# Altium PCB merlab_pcb_v0.PcbDoc
Units mm, origin at the board's own origin, x right, y up, seen from the top; angles counter-clockwise.
Board outline 120 x 74.03 mm, 2 copper layers (Top Layer, Bottom Layer); 59 components, 57 nets, 201 pads, 70 vias.
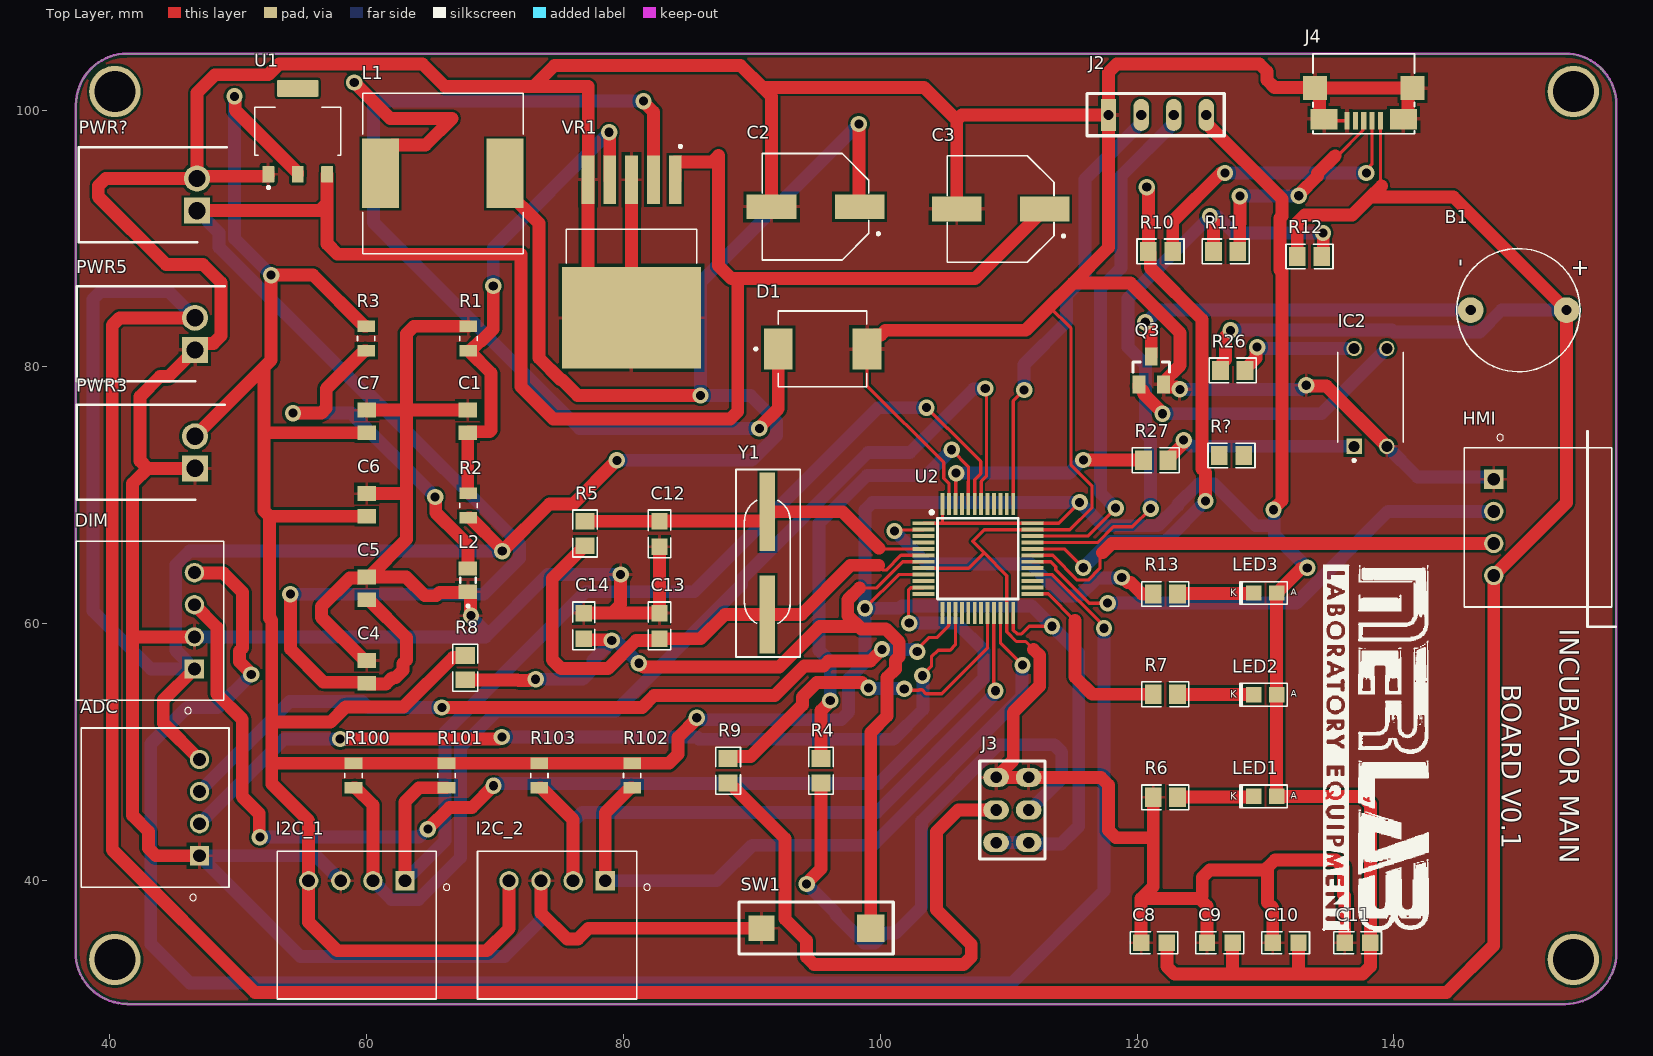
[diagram p0: Top Layer view]
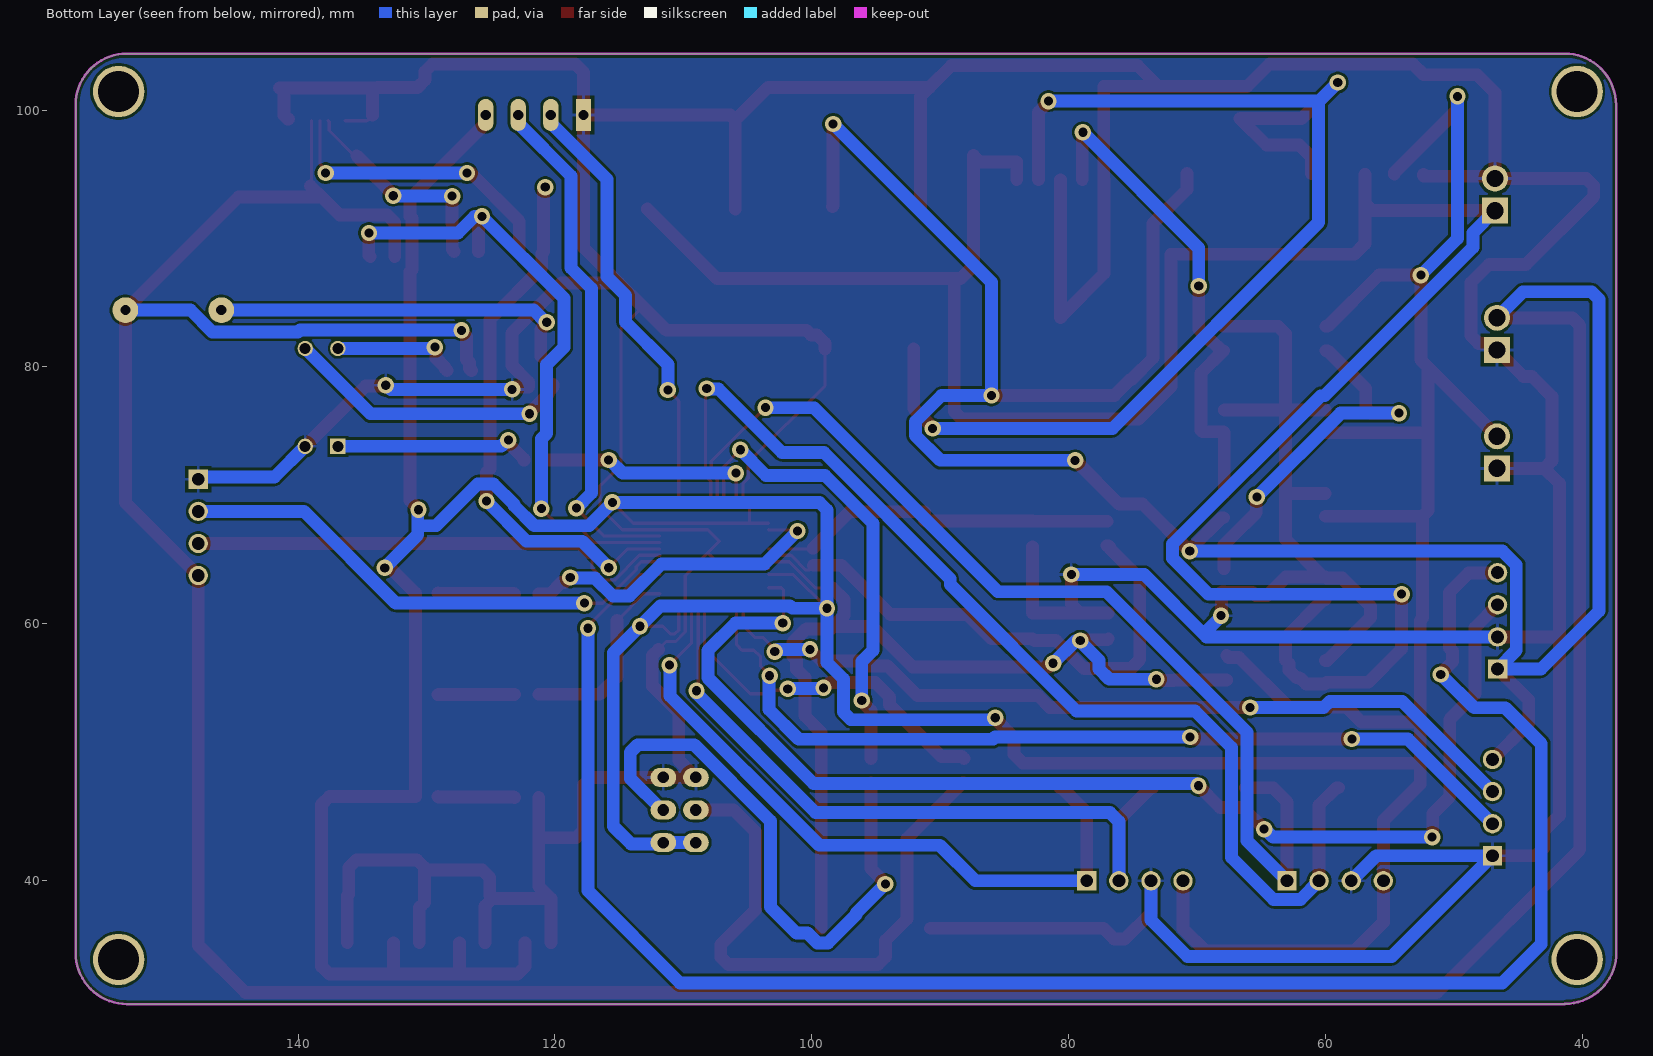
[diagram p1: Bottom Layer view, seen from below]
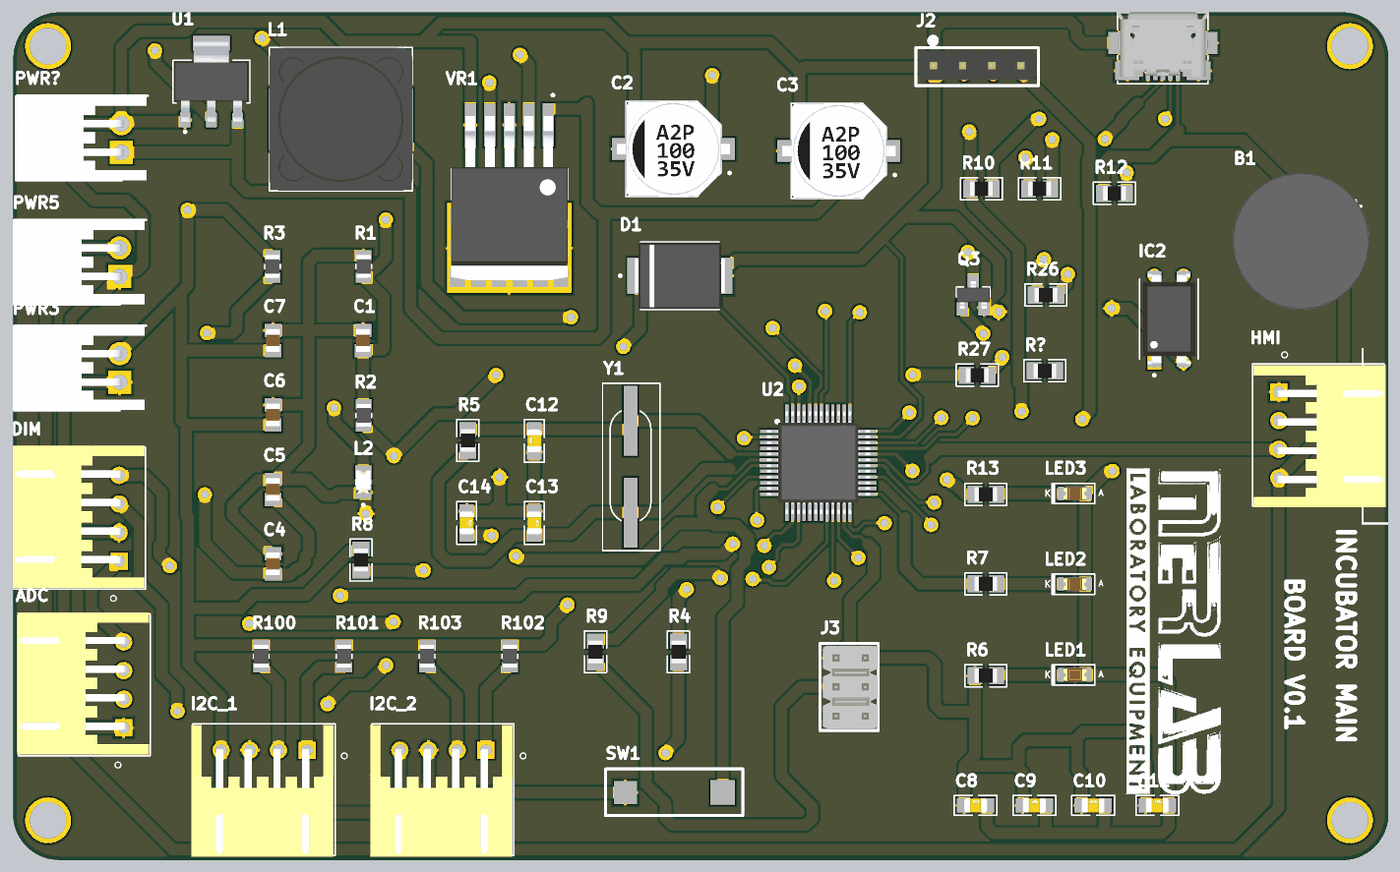
[diagram p2: 3D render of the assembled board from above, using the file's embedded part models]

## Layer stack, top to bottom
Top Solder: solder mask 0.0102, Solder Resist, Dk 3.5
Top Layer: signal copper 0.0356
Dielectric 1: dielectric 0.32, FR-4, Dk 4.8
Bottom Layer: signal copper 0.0356
Bottom Solder: solder mask 0.0102, Solder Resist, Dk 3.5

## Board outline
37.325,34.4 ccw(c41.325,34.4) 41.325,30.4 41.35,30.375 153.325,30.375 ccw(c153.325,34.375) 157.325,34.375 157.325,100.4 ccw(c153.325,100.4) 153.325,104.4 41.35,104.4 ccw(c41.35,100.4) 37.35,100.4 37.325,100.375

## Design rules (kind name [scope] priority, off if disabled: settings)
Clearance [All] p1: gap=0.2 ignorepadtopadclearanceinfootprint=FALSE
PolygonConnect [All] p1: connectstyle=Relief reliefconductorwidth=0.254 reliefentries=4 polygonreliefangle="90 Angle" airgapwidth=0.254
RoutingVias [All] p1: holewidth=0.711 width=1.27 viastyle="Through Hole" minholewidth=0.711 minwidth=1.27 maxholewidth=0.711 maxwidth=1.27
SolderMaskExpansion [All] p1: expansion=0.102 istentingtop=FALSE
Width [All] p1: maxlimit=3 minlimit=0.254 preferedwidth=1 minimp=50.000000 maximp=50.000000 favimp=50.000000
30 further rules are at their usual default settings.

## Classes and differential pairs
component class power_module: C1 C2 C3 C4 C5 C6 C7 D1 L1 L2 PWR? R1 R2 R3 U1 VR1
component class MCU_STM32: C8 C9 C10 C11 C12 C13 C14 J2 J3 LED1 LED2 LED3 R4 R5 R6 R7 R8 R9 R13 SW1 U2 Y1
component class MCU_Con: ADC B1 DIM HMI I2C_1 I2C_2 IC2 J4 PWR3 PWR5 Q3 R10 R11 R12 R26 R27 R100 R101 R102 R103 R?

## Components (designator, comment, footprint, x,y, rotation, side; value= is the part's Value field where it differs from the comment)
ADC "S3B-XH-A(LF)(SN)_1" JST_S4B-XH-A(LF)(SN) 46.975,45.675 r90 top
B1 "Buzzer" BUZZ 149.7,84.425 r270 top
C1 "1.2nF" CAP0805 67.867,75.752 r270 top
C2 "330uF" CAP220uF 94.95,92.475 r180 top
C3 "27uF" CAP220uF 109.375,92.3 r180 top
C4 "10uF" CAP0805 60,56.244 r90 top
C5 "0.1uF" CAP0805 60,62.747 r90 top
C6 "10uF" CAP0805 60,69.249 r90 top
C7 "0.1uF" CAP0805 60,75.752 r90 top
C8 "0.1uF" CAP_0805 121.313,35.153 r0 top
C9 "0.1uF" CAP_0805 126.438,35.153 r0 top
C10 "0.1uF" CAP_0805 131.564,35.153 r0 top
C11 "0.1uF" CAP_0805 137.164,35.153 r0 top
C12 "22pF" CAP_0805 82.8,66.99 r90 top
C13 "22pF" CAP_0805 82.8,59.825 r270 top
C14 "0.1uF" CAP_0805 76.898,59.825 r270 top
D1 "SS34" SS34DIODE 95.5,81.4 r0 top
DIM "S3B-XH-A(LF)(SN)_1" JST_S4B-XH-A(LF)(SN) 46.575,60.225 r90 top
HMI "S3B-XH-A(LF)(SN)_1" JST_S4B-XH-A(LF)(SN) 147.775,67.5 r270 top
I2C_1 "S3B-XH-A(LF)(SN)_1" JST_S4B-XH-A(LF)(SN) 59.225,39.975 r180 top
I2C_2 "S3B-XH-A(LF)(SN)_1" JST_S4B-XH-A(LF)(SN) 74.825,39.975 r180 top
IC2 "LTV-817" OPTO 138.175,77.625 r90 top
J2 "4X1 Bergstrip" CON4_100_40D72_TH_ST_MALE 117.77,99.625 r90 top
J3 "2X3 Berg Strip" CON6_100_59D78_TH_ST_Duplicate 111.55,42.95 r90 top
J4 "MICRO USB2.0" CON_10118192-0001LF_SMD 137.65,100.45 r180 top
L1 "33uH" INDUCTOR 65.925,95.075 r180 top
L2 "LED" LED 67.877,63.385 r90 top
LED1 "RED LED" LED_0805 129.978,46.551 r0 top
LED2 "RED LED" LED_0805 129.978,54.471 r0 top
LED3 "RED LED" LED_0805 129.978,62.391 r0 top
PWR3 "S2B-XH-A_LF__SN_" SHDRRA2W80P0X250_1X2_740X1150X610P 46.62,72.097 r90 top
PWR5 "S2B-XH-A_LF__SN_" SHDRRA2W80P0X250_1X2_740X1150X610P 46.62,81.323 r90 top
PWR? "S2B-XH-A_LF__SN_" SHDRRA2W80P0X250_1X2_740X1150X610P 46.775,92.175 r90 top
Q3 "MMBT2222*" SOT23-BEC 121.1,79.725 r0 top
R1 "1K" RES0805 67.912,82.21 r90 top
R2 "3.09K" RES0805 67.912,69.204 r90 top
R3 "1K" RES0805 59.955,82.21 r90 top
R4 "10K" RES_0805 95.375,48.551 r90 top
R5 "10Mohm" RES_0805 77,67.025 r90 top
R6 "1K" RES_0805 122.2,46.475 r180 top
R7 "1K" RES_0805 122.2,54.5 r180 top
R8 "10K" RES_0805 67.675,56.575 r270 top
R9 "10K" RES_0805 88.142,48.551 r90 top
R10 "20R" RES_0805 121.823,88.995 r180 top
R11 "20R" RES_0805 126.898,88.995 r180 top
R12 "4.7K" RES_0805 133.425,88.6 r180 top
R13 "1K" RES_0805 122.2,62.314 r180 top
R26 "1K" RES_0805 127.45,79.725 r0 top
R27 "1K" RES_0805 121.45,72.725 r0 top
R100 "4.7K" RES0805 58.975,48.175 r270 top
R101 "4.7K" RES0805 66.208,48.175 r270 top
R102 "4.7K" RES0805 80.673,48.175 r270 top
R103 "4.7K" RES0805 73.44,48.175 r270 top
R? "4.7K" RES_0805 127.35,73.1 r0 top
SW1 "TACT SWITCH" SW_342_SMD 90.75,36.275 r180 top
U1 "AMS1117-3.3" SOT229P700X180-4N 54.625,98.35 r0 top
U2 "STM32F103C8T6" LQFP-48_19.6_393_58X11_SMD 107.6,65.075 r0 top
VR1 "LM2596S-5.0" LM2596S 80.625,88.175 r270 top
Y1 "8MHz" XTAL_314_240X47_SMD 91.2,68.725 r270 top

## Footprints (in the part's own frame and the unit in brackets; to place one, negate y for a bottom-side part, rotate by r counter-clockwise, add the part's x,y. Pads: shape width x height; smd on the part's side, far side on the other; paste and mask are expansions set on the pad)
BUZZ [mm]
  round 2 hole 0.8: N(0,-3.725) P(0,3.75)
  silkscreen extent -4.8,-4.8 4.8,4.8, body extent -6,-6 6,6, height 9
CAP220uF [mm]
  rect 3.86x1.92 smd: 1(-3.429,0) 2(3.429,0)
  silkscreen extent -5,-4.15 4.15,4.15, body extent -4.95,-4.15 4.95,4.15, height 10.2
CAP0805 [mm]
  rect 1.16x1.47 smd: 1(-0.88,0) 2(0.88,0)
  body extent -1,-0.63 1,0.63, height 0.94
CAP_0805 [mm] "Ceramic Capacitor"
  rect 1.27x1.27 smd mask+0.076: 1(-1,0) 2(1,0)
  silkscreen extent -1.86,-0.86 1.86,0.86, body extent -1,-0.62 1,0.63, height 0.78
CON4_100_40D72_TH_ST_MALE [mm] "Berg Strip"
  rect 2.5x1.2 hole 0.8: 1(0,0)
  oval 2.5x1.2 hole 0.8: 2(0,-2.54) 3(0,-5.08) 4(0,-7.62)
  round 1.016 on Top Overlay: ""(2.311,0.178)
  silkscreen extent -1.63,-9.02 1.68,1.68, body extent -1.14,-8.76 1.4,1.4, height 8.55
CON6_100_59D78_TH_ST_Duplicate [mm] "Berg strip"
  oval 1.5x2 hole 0.9: 1(0,0) 2(0,2.54) 3(2.54,0) 4(2.54,2.54) 5(5.08,0) 6(5.08,2.54)
  silkscreen extent -1.27,-1.27 6.35,3.81, body extent -1.07,-1.27 6.15,3.56, height 8.18
CON_10118192-0001LF_SMD [mm] "USB2.0 MICRO"
  rect 0.4x1.35 smd: 1(-1.3,1.275) 2(-0.65,1.275) 3(0,1.275) 4(0.65,1.275) 5(1.3,1.275)
  rect 2.1x1.6 smd: 6(-3.1,1.15) 7(3.1,1.15)
  rect 1.9x1.9 smd: 8(-3.8,-1.275) 9(3.8,-1.275)
  silkscreen extent -3.95,-3.94 3.95,2.3, body extent -4.04,-3.94 4.04,1.66, height 2.81
INDUCTOR [mm]
  rect 2.9x5.4 smd: 1(-4.85,0) 2(4.85,0)
  silkscreen extent -6.25,-6.25 6.25,6.25, body extent -6.25,-6.25 6.25,6.25, height 6
JST_S4B-XH-A(LF)(SN) [mm]
  rect 1.508x1.508 hole 1: 1(-3.75,0)
  round 1.508 hole 1: 2(-1.25,0) 3(1.25,0) 4(3.75,0)
  silkscreen extent -7.25,-2.3 6.2,9.2, body extent -6.07,-2.19 6.33,9.31, height 6.15
LED [mm]
  rect 1.1x1.45 smd: A(0.9,0) C(-0.9,0)
  silkscreen extent -2.1,-0.6 0.2,0.6, body extent -1,-0.63 1,0.63, height 0.8
LED_0805 [mm] "LED"
  rect 1.2x1.2 smd mask+0.076: A(0.889,0) K(-0.889,0)
  silkscreen extent -1.99,-0.89 1.73,0.89, body extent -1.01,-0.62 1.01,0.63, height 1.1
LM2596S [mm]
  rect 3.79x0.99 smd: 1(-6.4,3.4) 2(-6.4,1.7) 3(-6.4,0) 4(-6.4,-1.7) 5(-6.4,-3.4)
  rect 7.88x10.84 smd paste-6: 6(4.35,0)
  silkscreen extent -9.1,-5.08 0.09,5.08, body extent -7.18,-5.08 7.18,5.08, height 4.65
LQFP-48_19.6_393_58X11_SMD [mm] "48LQFP"
  rect 1.7x0.3 smd mask+0.076: 1(-4.238,2.75) 2(-4.238,2.25) 3(-4.238,1.75) 4(-4.238,1.25) 5(-4.238,0.75) 6(-4.238,0.25) 7(-4.238,-0.25) 8(-4.238,-0.75) 9(-4.238,-1.25) 10(-4.238,-1.75) 11(-4.238,-2.25) 12(-4.238,-2.75) 25(4.238,-2.75) 26(4.238,-2.25) 27(4.238,-1.75) 28(4.238,-1.25) 29(4.238,-0.75) 30(4.238,-0.25) 31(4.238,0.25) 32(4.238,0.75) 33(4.238,1.25) 34(4.238,1.75) 35(4.238,2.25) 36(4.238,2.75)
  rect 0.3x1.7 smd mask+0.076: 13(-2.75,-4.238) 14(-2.25,-4.238) 15(-1.75,-4.238) 16(-1.25,-4.238) 17(-0.75,-4.238) 18(-0.25,-4.238) 19(0.25,-4.238) 20(0.75,-4.238) 21(1.25,-4.238) 22(1.75,-4.238) 23(2.25,-4.238) 24(2.75,-4.238) 37(2.75,4.238) 38(2.25,4.238) 39(1.75,4.238) 40(1.25,4.238) 41(0.75,4.238) 42(0.25,4.238) 43(-0.25,4.238) 44(-0.75,4.238) 45(-1.25,4.238) 46(-1.75,4.238) 47(-2.25,4.238) 48(-2.75,4.238)
  silkscreen extent -3.72,-3.15 3.15,3.72, body extent -4.5,-4.5 4.5,4.5, height 1.7
OPTO [mm]
  rect 1.2x1.2 hole 0.85: 1(-3.81,1.27)
  round 1.2 hole 0.85: 2(-3.81,-1.27) 3(3.81,-1.27) 4(3.81,1.27)
  silkscreen extent -5.01,-2.55 3.5,2.55, body extent -4.53,-2.3 4.53,2.3, height 5
RES0805 [mm]
  rect 0.92x1.38 smd: 1(-0.955,0) 2(0.955,0)
  silkscreen extent -0.17,-0.68 0.17,0.68, body extent -1,-0.63 1,0.63, height 0.6
RES_0805 [mm] "Resister"
  rect 1.3x1.5 smd mask+0.076: 1(0.95,0) 2(-0.95,0)
  silkscreen extent -1.83,-0.97 1.83,0.97, body extent -1,-0.63 1,0.62, height 0.5
SHDRRA2W80P0X250_1X2_740X1150X610P [mm]
  rect 2.025x2.025 / inner round 2.025 / far side rect 2.025x2.025 hole 1.35: 1(0,0)
  round 2.025 hole 1.35: 2(2.5,0)
  silkscreen extent -2.45,-2.3 4.95,9.2, body extent -2.43,-2.19 4.97,9.31, height 6.1
SOT23-BEC [mm]
  rect 1x1.4 smd: B(-0.95,-1.1) C(0,1.1) E(0.95,-1.1)
  silkscreen extent -1.42,-0.15 1.42,0.66, body extent -1.45,-1.2 1.45,1.2, height 1.11
SOT229P700X180-4N [mm]
  rrect15% 0.93x1.31 smd: 1(-2.29,-3.345) 2(0,-3.345) 3(2.29,-3.345)
  rrect15% 3.24x1.31 smd: 4(0,3.345)
  silkscreen extent -3.36,-4.47 3.36,1.86, body extent -3.25,-3.5 3.25,3.5, height 1.77
SS34DIODE [mm]
  rect 2.25x3.18 smd: A(3.455,0) C(-3.455,0)
  silkscreen extent -5.3,-2.95 3.44,2.95, body extent -3.95,-2.9 3.95,2.9, height 2.5
SW_342_SMD [mm] "CASE: SMD"
  rect 2x2 smd: 1(0,0)
  rect 2.15x2.15 smd: 2(-8.5,0)
  silkscreen extent -10.25,-2.06 1.75,2, body extent -7.17,-1.79 -1.17,1.71, height 2.4
XTAL_314_240X47_SMD [mm] "CASE: TH"
  rect 6.096x1.2 smd: 1(0,0) 2(8,0)
  silkscreen extent -3.29,-2.44 11.32,2.57, body extent -2.99,-2.27 10.9,2.41, height 3.05

## Part data
ADC DIM HMI I2C_1 I2C_2: "Connector Header Through Hole, Right Angle 3 position 0.098 (2.50mm)", Package="Custom Package JST Sales", Check_prices=https://www.snapeda.com/parts/S3B-XH-A(LF)(SN)/JST+Sales+America+Inc./view-part/?ref=eda, Digi-Key_Part_Number=455-2250-ND, MF="JST Sales", MP=S3B-XH-A(LF)(SN), Purchase-URL=https://pricing.snapeda.com/search/part/S3B-XH-A(LF)(SN)/?ref=eda, SnapEDA_Link=https://www.snapeda.com/parts/S3B-XH-A(LF)(SN)/JST+Sales+America+Inc./view-part/?ref=snap
B1: "9.6 mm, 3 Vdc, 80 dB, Through Hole, Driving Circuit, Magnetic Audio Indicator Buzzer", Package=Package, Availability=Unavailable, MF="CUI Devices", MP=CMI-9605IC-0380T, Price=None, SnapEDA_Link=https://www.snapeda.com/parts/CMI-9605IC-0380T/CUI%20Devices/view-part/4413414/?ref=snap
C1 C4 C5 C6 C7: library part CAP0805, "10000pF Â±5% 16V Ceramic Capacitor X7R 0805 _2012 Metric_", Package="2012 AVX", Availability=Unavailable, MF=AVX, MP=0805YC103J4T2A, Price=None, SnapEDA_Link=https://www.snapeda.com/parts/0805YC103J4T2A/AVX/view-part/606803/?ref=snap
C2 C3: library part CAP, "220µF 35V AND 100µf 50V Aluminum Electrolytic Capacitors Radial, Can 98.8mOhm @ 120Hz 2000 Hrs @ 85Â°C", Package="Radial Illinois Capacitor", Availability=Warning, MF="Illinois Capacitor", Mouser-Purchase-URL=https://snapeda.com/shop?store=Mouser&id=2347563, MP=478CKS010M, Price=None, SnapEDA_Link=https://www.snapeda.com/parts/478CKS010M/Illinois%20Capacitor/view-part/2347563/?ref=snap
C8 C9 C10 C11 C14: library part CAP_0.1uF-50V-5%-0805, "0.1µF ±5% 50V Ceramic Capacitor X7R 0805 (2012 Metric)", Case/Package="0805 (2012 Metric)", Manufacturer=KEMET, Manufacturing Part Number=C0805C104J5RACTU, Supplier Part Number-1=399-1171-1-ND, Supplier-1=Digikey
C12 C13: library part CAP_22pF-50V-5%-0805, "22pF ±5% 50V Ceramic Capacitor C0G, NP0 0805 (2012 Metric)", Case/Package=0805, Manufacturer=KEMET, Manufacturer Part Number=C0805C220J5GACTU, Supplier Part Number-1=399-1113-1-ND, Supplier-1=Digikey
D1: "Diode Schottky 40V 3A Surface Mount SMC _DO-214AB_", Package="DO-214AB-214 ON Semiconductor", Availability=Unavailable, MF="ON Semiconductor", MP=SS34, Price=None, SnapEDA_Link=https://www.snapeda.com/parts/SS34/ON%20Semiconductor/view-part/4631325/?ref=snap
IC2: "Optoisolator Transistor Output 5000Vrms 1 Channel 4-SMD", Package="DIP-4 Lite-On Electronics", Availability=Unavailable, MF="Lite-On Electronics", MP=LTV-817, Price=None, SnapEDA_Link=https://www.snapeda.com/parts/LTV-817/ICS/view-part/4478599/?ref=snap
J2: library part CON-BS-PLG_4X1-100-TH-ST, "4 pin, 1 row, 2.54mm pitch bergstrip", Case/Package=TH, Manufacturer=NA, Manufacturing Part Number=NA, Supplier Part Number-1=NA, Supplier-1=NA
J3: library part CON-BS-PLG_2X3-100-TH-ST, "6 pin, 2 row, 2.54mm pitch bergstrip", Case/Package=TH, Manufacturer=NA, Manufacturer Part Number=NA, Supplier Part Number-1=NA, Supplier-1=NA
J4: library part CON-USB_10118192-0002LF-SMD, "USB - micro B USB 2.0 Receptacle Connector 5 Position Surface Mount, Right Angle", Case/Package=SMD, Manufacturer="Amphenol ICC (FCI)", Manufacturing Part Number=10118192-0002LF, Supplier Part Number-1=609-5379-1-ND, Supplier-1=Digikey
L1: library part INDUCTOR, "33ÂµH Shielded Wirewound Inductor 3A 60mOhm Max Nonstandard", Package="Nonstandard Bourns", Availability=Unavailable, MF=Bourns, MP=SRR1260-330M, Price=None, SnapEDA_Link=https://www.snapeda.com/parts/SRR1260-330M/Bourns/view-part/378985/?ref=snap
L2: "Red LED Indication - Discrete 2V 0805 _2012 Metric_", Package="0805 Lumex", Availability=Unavailable, MF="Lumex Opto/Components", MP=SML-LXT0805IW-TR, Price=None, SnapEDA_Link=https://www.snapeda.com/parts/SML-LXT0805IW-TR/Lumex%20Opto/Components%20Inc./view-part/340416/?ref=snap
LED1 LED2 LED3: library part LED-RED_10mA-0805, "Red 621nm LED Indication - Discrete 2V 0805 (2012 Metric)", Case/ Package=0805, Manufacturer="Lite-On Inc.", Manufacturer Part Number=LTST-C170EKT, Supplier Part Number-1=160-1178-1-ND, Supplier-1=Digikey
PWR3 PWR5 PWR?: "XH-2.5mm Header side entry 2 way JST XH Series, Series Number S2B, 2.5mm Pitch 2 Way 1 Row Right Angle PCB Header, Solder Termination, 3A", Arrow Part Number=S2B-XH-A(LF)(SN), Manufacturer_Name="JST (JAPAN SOLDERLESS TERMINALS)", Arrow Price/Stock=https://www.arrow.com/en/products/s2b-xh-a-lf-sn/jst-manufacturing?region=europe, Datasheet Link=http://www.jst-mfg.com/product/pdf/eng/eXH.pdf, Geometry.Height=6.1mm, Manufacturer_Part_Number=S2B-XH-A(LF)(SN)
Q3: "<b>NPN Transistor</b>", Package=None, Availability=Unavailable, MF="{'manufacturer': u'ON Semiconductor'}", MP=MMBT2222-, Price=None
R1 R2 R3 R100 R101 R102 R103: library part RES0805, "910 Ohms Â±1% 0.125W, 1/8W Chip Resistor 0805 _2012 Metric_ Moisture Resistant Thick Film", Package="2012 Rohm Semiconductor", Availability=Unavailable, MF=Yageo, MP=RC0805FR-07910RL, Price=None, SnapEDA_Link=https://www.snapeda.com/parts/RC0805FR-07910RL/Yageo/view-part/106117/?ref=snap
R4 R8 R9: library part RES_10K-0.125W-1%-0805, "10 kOhms ±1% 0.125W, 1/8W Chip Resistor 0805 (2012 Metric) Moisture Resistant Thick Film", Case/Package=0805, Manufacturer=Yageo, Manufacturing Part Number=RC0805FR-0710KL, Supplier Part Number-1=311-10.0KCRCT-ND, Supplier-1=Digikey
R5: library part RES_10MOHM-0.125W-1%-0805, "10 MOhms ±1% 0.125W, 1/8W Chip Resistor 0805 (2012 Metric) Automotive AEC-Q200, High Voltage Thick Film", Case/Package="0805 (2012 Metric)", Manufacturer="Rohm Semiconductor", Manufacturing Part Number=KTR10EZPF1005, Supplier Part Number-1=RHM10.0MAHCT-ND, Supplier-1=Digikey
R6 R7 R10 R11 R12 R13 R26 R27 R?: library part RES_1K-0.125W-1%-0805, "1 kOhms ±1% 0.125W, 1/8W Chip Resistor 0805 (2012 Metric) Moisture Resistant Thick Film", Case/Package=0805, Manufacturer=垈㎵á, Manufacturer Part Number=RC0805FR-071KL, Supplier Part Number-1=311-1.00KCRCT-ND, Supplier-1=Digikey
SW1: library part SW_KSR223GLFG-SMD, "Tactile Switch SPST-NO Top Actuated Surface Mount", Case/Package=SMD, Manufacturer=C&K, Manufacturing Part Number=KSR223GLFG, Supplier Part Number-1=401-1704-1-ND, Supplier-1=Digikey
U1: "Sot223/Pkg 1-Amp 3.3-Volt Low Drop Out Voltage Regulatator", Package=None, Availability=Unavailable, MF="Advanced Monolithic Systems", MP=AMS1117-3.3, Price=None, SnapEDA_Link=https://www.snapeda.com/parts/AMS1117-3.3/Advanced%20Monolithic%20Systems/view-part/53450/?ref=snap
U2: library part "IC-STM32F103C8T6 _1", "ARM® Cortex®-M3 STM32F1 Microcontroller IC 32-Bit 72MHz 64KB (64K x 8) FLASH", Case/Package=48-LQFP, Manufacturer=STMicroelectronics, Supplier Part Number-1=497-6063-ND, Manufacturer Part Number=STM32F103C8T6, Supplier-1=Digikey
VR1: "SIMPLE SWITCHER&reg; 4.5V to 40V, 3A Low Component Count Step-Down Regulator 5-DDPAK/TO-263", Package="TO-263-5 Texas Instruments", Availability=Good, DigiKey-Purchase-URL=https://snapeda.com/shop?store=DigiKey&id=15588, MF="Texas Instruments", Mouser-Purchase-URL=https://snapeda.com/shop?store=Mouser&id=15588, MP=LM2596S-5.0/NOPB, Price=None, SnapEDA_Link=https://www.snapeda.com/parts/LM2596S-5.0/NOPB/Texas%20Instruments/view-part/15588/?ref=snap, Texas_Instruments-Purchase-URL=https://snapeda.com/shop?store=Texas+Instruments&id=15588
Y1: library part XTAL_8MHZ-LFXTAL030234, "Crystals 8MHz 22pF -20C 70C", Case/Package=SMD, Manufacturer="IQD Frequency Products", Manufacturing Part Number=LFXTAL030234Reel, Supplier Part Number-1=449-LFXTAL030234REEL, Supplier-1=Mouser

## Free pads (board coordinates)
  round 4 hole 3.2: 21(40.375,33.85) 21(40.375,101.45) 21(153.975,33.85) 21(153.975,101.45)

## Via types
v1: diameter 1.27, hole 0.711, Top Layer to Bottom Layer, 70 vias

## Nets (pads, with @x,y where several pads share a name; then routed paths per layer and width w, separated by ;. In a path a pad name is that pad's centre, name@x,y a point inside that pad or via, vN(x,y) a via of type N, cw(c..) or ccw(c..) an arc to the next point about the centre after c; other vN are vias at no path point)
+3V3: C6.1 C7.1 C8.2 C9.2 C10.2 C11.2 I2C_1.4 I2C_2.4 J2.4 J3.1 J3.2 LED1.A LED2.A LED3.A PWR3.2 R3.2 R8.2 R100.1 R101.1 R102.1 R103.1 U1.2 U2.1 U2.9 U2.24 U2.36 U2.48 | length 410.2
  Top Layer w0.254: v1(98.8,61.2) 101.425,63.825 U2.9 ; U2.1 104.8,67.825 ; U2.48 104.85,67.875 104.8,67.825 ; U2.24 110.35,59.5 110.65,59.2 111,59.2 111.6,59.8 v1(113.375,59.8) ; v1(115.525,69.45) 113.9,67.825 U2.36 104.8,67.825
  Top Layer w1: PWR3.2 52,79.977 ; v1(49.7,101.075) 49.752,101.023 49.752,99.998 54.625,95.125 U1.2 ; R3.2 59.805,83.165 55.82,87.15 v1(52.55,87.15) 52.55,80.527 52,79.977 ; C6.1 52.431,68.369 ; C7.1 52.072,74.872 52,74.8 ; R8.2 67.525,57.375 66.712,57.375 62.862,53.525 58.363,53.525 57.188,52.35 52.6,52.35 ; I2C_2.4 71.075,36.25 69.35,34.525 57.7,34.525 55.475,36.75 I2C_1.4 55.475,44.653 52.6,47.528 52.6,49.13 ; v1(85.7,52.675) 85.7,52.602 84.237,51.139 84.237,49.837 83.53,49.13 R102.1 R103.1 R101.1 R100.1 52.6,49.13 ; C8.2 122.313,33.311 122.899,32.725 127.438,32.725 ; J2.4 125.39,98.975 131.275,93.09 131.275,91.736 131.125,91.586 131.125,87.56 131.275,87.41 131.275,69.596 130.625,68.946 v1(130.625,68.875) ; C9.2 127.438,32.725 ; C10.2 132.564,32.725 ; v1(133.25,64.35) 133.198,64.298 132.775,64.298 LED3.A LED2.A LED1.A 137.552,46.551 138.164,45.939 138.164,33.311 137.578,32.725 132.564,32.725 ; 52,74.8 52,79.977 ; 52,74.8 52,68.8 52.431,68.369 ; 52.431,68.369 52.431,60.444 52.6,60.275 52.6,52.35 ; 52.6,49.13 52.6,52.35 ; 127.438,32.725 132.564,32.725
  Bottom Layer w1: v1(49.7,101.075) 49.7,90 v1(52.55,87.15) ; v1(85.7,52.675) 85.773,52.675 85.923,52.525 96.939,52.525 97.525,53.111 97.525,55.702 98.8,56.977 v1(98.8,61.2) ; J3.2 109.01,42.985 109.025,43 109.075,42.95 J3.1 111.646,42.854 114.079,42.854 115.45,44.225 115.45,57.725 v1(113.375,59.8) 111.795,61.38 101.697,61.38 101.517,61.2 v1(98.8,61.2) ; v1(130.625,68.875) 130.677,68.823 130.677,67.625 ; v1(133.25,64.35) 130.677,66.923 130.677,67.625 ; v1(98.8,61.2) 98.8,68.864 99.386,69.45 v1(115.525,69.45) 117.35,67.625 121.603,67.625 123.188,69.21 123.188,69.3 124.772,70.885 126.002,70.885 129.262,67.625 130.677,67.625
+5V: ADC.4 B1.P C2.1 DIM.1 HMI.4 J4.1 L1.1 PWR5.2 R2.1 R12.1 R26.2 | length 463.5
  Top Layer w0.254: J4.1 138.95,94.175 139.025,94.1
  Top Layer w1: DIM.1 44.15,54.05 44.15,52.25 ADC.4 ; PWR5.2 40.761,83.823 40.175,83.237 40.175,42.389 51.289,31.275 144.1,31.275 147.775,34.95 HMI.4 153.45,69.425 B1.P 144.638,93.237 138.162,93.237 ; R2.1 68.062,68.249 70.498,65.813 70.498,65.702 v1(70.55,65.65) 74.225,69.325 76.075,69.325 v1(79.475,72.725) ; L1.1 70.775,93.825 73.413,91.187 73.413,80.688 75.1,79 75.2,79 76.425,77.775 v1(86,77.775) ; v1(98.325,98.925) 98.325,92.529 C2.1 ; R26.2 126.65,79.875 126.65,80.336 126.875,80.561 126.875,82.377 127.275,82.777 v1(127.275,82.85) ; R12.1 132.475,91.239 133.061,91.825 136.75,91.825 138.162,93.237 ; 139.025,94.1 138.162,93.237
  Bottom Layer w1: PWR5.2 44.59,85.854 39.264,85.854 38.679,85.268 38.679,60.996 43.2,56.475 DIM.1 45.121,57.929 45.121,64.577 46.194,65.65 v1(70.55,65.65) ; v1(79.475,72.725) 89.988,72.725 91.91,74.647 91.91,75.753 89.888,77.775 v1(86,77.775) 86,86.6 v1(98.325,98.925) ; v1(127.275,82.85) 127.3,82.875 139.843,82.875 139.993,82.725 146.679,82.725 148.379,84.425 B1.P
BOOT0: J3.3 R4.2 | length 46.4
  Top Layer w1: v1(94.26,39.725) 94.26,39.798 95.375,40.913 R4.2
  Bottom Layer w1: v1(94.26,39.725) 96.521,37.464 96.521,37.354 98.731,35.144 99.559,35.144 100.313,35.898 101.182,35.898 103.218,37.934 103.218,44.643 109.15,50.575 113.539,50.575 114.125,49.989 114.125,47.95 111.665,45.49 J3.3
BOOT1: J3.4 R9.2 | length 45.7
  Top Layer w1: R9.2 88.242,47.601 92.575,43.268 92.575,37 94.25,35.325 94.25,34.036 94.836,33.45 106.489,33.45 107.075,34.036 107.075,35.025 104.375,37.725 104.375,43.8 106.065,45.49 J3.4
D_N: R10.1 U2.32 | length 42.6
  Top Layer w0.254: U2.32 114.338,65.825 v1(115.8,64.363)
  Top Layer w1: v1(120.75,94) 120.75,93.927 120.873,93.804 R10.1 121.023,88.845 121.023,87.727 125.05,83.7 125.05,72.06 125.325,71.785 v1(125.325,69.55)
  Bottom Layer w1: v1(115.8,64.363) 117.862,66.425 122.2,66.425 v1(125.325,69.55)
D_P: R11.1 R12.2 U2.33 | length 50.5
  Top Layer w0.254: U2.33 116.93,66.325 118.151,67.545 119.635,67.545 v1(121.05,68.96)
  Top Layer w1: v1(125.675,91.725) 125.675,91.652 125.948,91.379 R11.1 ; R12.2 134.5,88.725 134.5,90.2 134.475,90.225 v1(134.475,90.425)
  Bottom Layer w1: v1(121.05,68.96) 121.05,74.404 120.64,74.814 120.64,80.185 119.296,81.529 119.296,85.346 v1(125.675,91.725) 126.25,91.725 127.55,90.425 v1(134.475,90.425)
GND: ADC.1 C1.1 C2.2 C3.2 C4.2 C5.2 C6.2 C7.2 C8.1 C9.1 C10.1 C11.1 C12.1 C13.1 C14.1 D1.A DIM.2 HMI.1 I2C_1.3 I2C_2.3 IC2.2 J2.1 J3.5 J3.6 J4.5 J4.6 J4.7 J4.8 J4.9 L2.C PWR3.1 PWR5.1 PWR?.2 Q3.E R1.2 R6.1 SW1.1 U1.1 U2.8 U2.23 U2.35 U2.47 VR1.3 VR1.5 VR1.6 | length 640.8
  Top Layer w0.254: D1.A 98.955,78.545 104.938,72.562 104.938,71.327 105.35,70.915 U2.47 ; U2.8 106.875,64.325 108.075,65.525 ; 111.925,58 111.313,58.613 110.595,58.613 109.85,59.358 U2.23 109.85,63.75 108.075,65.525 ; 113.162,84.687 114.853,82.997 114.853,72.352 116.487,70.718 116.487,69.052 114.76,67.325 U2.35 108.1,67.325 107.187,66.412 108.075,65.525 ; J4.7@134.2,99.6 134.625,99.175 J4.5
  Top Layer w1: PWR5.1@46.295,81.648 46.482,81.835 48.064,81.835 48.65,82.421 48.65,86.575 47.25,87.975 44.375,87.975 39.089,93.261 39.089,94.089 39.675,94.675 PWR?.2 ; DIM.2 42,58.975 41.75,59.225 ; PWR3.1 42.936,72.097 ; PWR5.1 44.554,79.257 43.904,79.257 42.35,77.703 42.35,72.683 42.936,72.097 ; ADC.1 43.586,41.925 43,42.511 43,43.825 41.75,45.075 41.75,59.225 ; U1.1 52.335,94.885 52.3,94.85 46.95,94.85 PWR?.2 ; C4.2 59.845,57.124 56.461,60.508 56.461,61.336 58.672,63.547 59.92,63.547 C5.2 C5.2@60.155,63.627 ; C6.2 62.946,70.129 63.1,69.975 ; C7.2 62.957,76.632 63.1,76.775 ; C1.1 63.243,76.632 63.1,76.775 ; R1.2 63.686,83.165 63.1,82.579 63.1,76.775 ; v1(68.125,60.625) 68.073,60.677 68.073,62.435 68.023,62.485 L2.C 67.827,62.435 65.652,62.435 65.392,62.175 64.525,62.175 63.073,63.627 C5.2@60.155,63.627 ; I2C_2.3 73.575,37.475 75.611,35.439 76.439,35.439 77.275,36.275 SW1.1 ; C14.1 79.1,60.825 ; VR1.5 77.225,87.265 80.515,83.975 VR1.6@80.625,83.975 ; VR1.5@77.25,94.575 77.25,101.84 77.245,101.845 73,101.845 ; v1(79.775,63.825) 79.775,61.5 79.1,60.825 ; VR1.6 VR1.6@80.625,83.975 ; VR1.3 VR1.6@80.625,83.975 ; C12.1 C13.1 79.1,60.825 ; C2.2 91.521,101.071 90.817,101.775 ; D1.A 98.955,81.865 99.58,82.49 100.045,82.49 100.405,82.85 111.325,82.85 113.162,84.687 115,86.525 ; C3.2 105.946,99.229 ; J3.6 J3.6@109.125,48.03 ; 111.925,58 112.41,57.515 112.41,55.16 110.35,53.1 110.35,49.37 109.356,48.376 109.356,48.261 J3.6@109.125,48.03 ; C8.1 120.313,38.6 ; R6.1 121.25,43.25 ; v1(123.325,78.25) 123.252,78.25 123.077,78.425 122.05,78.425 122.05,78.825 123.35,80.125 123.35,82.65 119.475,86.525 115,86.525 ; C9.1 125.438,38.014 124.853,38.6 ; C10.1 130.564,37.877 130.15,38.29 130.15,41.014 ; v1(133.175,78.575) 133.227,78.523 134.737,78.523 IC2.2 ; J4.7@134.2,99.6 134.2,101.375 J4.9 ; C11.1 136.164,38.786 136.05,38.9 136.05,41.014 135.464,41.6 130.736,41.6 130.15,41.014 ; J4.6 140.8,99.3 141.1,99.6 141.1,101.375 J4.8 J4.9 ; 41.75,59.225 41.75,70.912 42.936,72.097 ; PWR?.2 46.775,101.35 48.175,102.75 52.325,102.75 53.175,103.6 64.332,103.6 66.087,101.845 73,101.845 ; C5.2@60.155,63.627 63.1,66.572 63.1,69.975 ; 63.1,69.975 63.1,76.775 ; 73,101.845 74.63,103.475 89.117,103.475 90.817,101.775 ; 90.817,101.775 103.4,101.775 105.946,99.229 ; 105.946,99.229 106.342,99.625 J2.1 ; J3.6@109.125,48.03 J3.5 117.189,48.03 117.775,47.444 117.775,43.911 118.361,43.325 121.175,43.325 121.25,43.25 ; 115,86.525 117.77,89.295 J2.1 ; J2.1 117.77,102.955 118.415,103.6 129.539,103.6 130.125,103.014 130.125,102.336 130.711,101.75 133.825,101.75 J4.9 ; 120.313,38.6 121.25,39.537 121.25,43.25 ; 120.313,38.6 124.853,38.6 ; 124.853,38.6 125.075,38.822 125.075,40.239 125.661,40.825 129.961,40.825 130.15,41.014
  Bottom Layer w1: DIM.2 69.25,58.975 ; I2C_1.3 56.025,41.925 ADC.1 54.825,34.075 70.725,34.075 73.575,36.925 I2C_2.3 ; v1(68.125,60.625) 68.125,60.552 69.25,59.427 69.25,58.975 ; v1(79.775,63.825) 74.1,63.825 69.25,58.975 ; v1(123.325,78.25) 132.777,78.25 133.102,78.575 v1(133.175,78.575) ; IC2.2 141.835,71.425 147.6,71.425 HMI.1
NetB1_N: B1.N Q3.C | length 28.6
  Top Layer w1: v1(120.631,83.481) 120.631,83.408 121.1,82.939 Q3.C
  Bottom Layer w1: v1(120.631,83.481) 120.704,83.481 121.648,84.425 B1.N
NetC1_2: C1.2 R1.1 R2.2 VR1.4 | length 38.9
  Top Layer w1: R2.2 67.907,70.159 67.867,70.199 C1.2 67.947,74.952 69.563,74.952 69.675,75.064 69.675,79.519 R1.1@67.939,81.255 ; R1.1 R1.1@67.939,81.255 ; v1(69.85,86.3) 69.85,82.963 68.889,82.002 68.809,82.002 68.062,81.255 R1.1@67.939,81.255 ; v1(78.875,98.275) 78.92,98.23 78.92,94.58 VR1.4
  Bottom Layer w1: v1(69.85,86.3) 69.85,89.25 v1(78.875,98.275)
NetC3_1: C3.1 C4.1 C5.1 PWR?.1 U1.3 VR1.1 | length 190
  Top Layer w1: PWR?.1 56.329,92.175 56.915,92.761 ; v1(54.05,62.3) 54.05,58.025 56.631,55.444 59.92,55.444 60.08,55.284 60.096,55.3 61.5,55.3 61.986,55.786 62.239,55.786 62.825,56.372 62.825,56.9 63.1,57.175 63.1,58.922 60.155,61.867 C5.1 ; U1.3 56.915,92.761 ; VR1.1 84.025,95.965 84.03,95.97 86.895,95.97 87.4,96.475 87.4,87.875 88.4,86.875 107.379,86.875 C3.1 ; 88.9,86.875 88.9,76.536 88.314,75.95 74.525,75.95 72.014,78.461 72.014,88.775 57.725,88.775 56.915,89.585 56.915,92.761
  Bottom Layer w1: PWR?.1 48.5,90.45 48.5,89.312 60.055,77.757 60.33,77.757 71.885,66.203 71.885,65.097 69.088,62.3 v1(54.05,62.3)
NetD1_C: D1.C L1.2 VR1.2 | length 99.3
  Top Layer w1: v1(59.025,102.15) 61.825,99.35 66.65,99.35 64.575,97.275 62.025,97.275 61.075,96.325 L1.2 ; v1(81.55,100.7) 81.55,100.627 82.325,99.852 VR1.2 ; v1(90.575,75.2) 90.575,75.273 92.045,76.743 D1.C
  Bottom Layer w1: v1(59.025,102.15) 60.512,100.663 60.512,91.263 76.575,75.2 v1(90.575,75.2) ; 60.548,100.7 v1(81.55,100.7)
NetJ4_2: J4.2 R10.2 | length 23.2
  Top Layer w0.254: v1(137.85,95.1) 137.85,95.375 138.3,95.825 J4.2
  Top Layer w1: R10.2 122.773,91.348 126.525,95.1 v1(126.85,95.1)
  Bottom Layer w1: v1(126.85,95.1) v1(137.85,95.1)
NetJ4_3: J4.3 R11.2 | length 17
  Top Layer w0.254: 135.425,96.45 135.612,96.45 137.577,98.415 137.577,99.102 J4.3
  Top Layer w1: R11.2 127.998,89.145 127.998,91.163 128,91.165 v1(128,93.3) ; v1(132.588,93.33) 132.588,93.403 134.054,94.869 134.054,95.079 135.425,96.45
  Bottom Layer w1: v1(128,93.3) 128.015,93.315 132.573,93.315 v1(132.588,93.33)
NetL2_A: L2.A R3.1 | length 29
  Top Layer w1: v1(54.25,76.4) 56.45,76.4 56.85,76.8 56.85,78.3 59.805,81.255 R3.1 ; v1(65.325,69.875) 65.377,69.823 65.377,68.645 67.198,66.824 67.201,66.824 67.877,66.148 L2.A
  Bottom Layer w1: v1(54.25,76.4) 58.8,76.4 v1(65.325,69.875)
NetLED1_K: LED1.K R6.2 | length 6
  Top Layer w1: R6.2 123.188,46.513 129.051,46.513 LED1.K
NetLED2_K: LED2.K R7.2 | length 6
  Top Layer w1: R7.2 123.164,54.485 129.074,54.485 LED2.K
NetLED3_K: LED3.K R13.2 | length 6
  Top Layer w1: R13.2 123.188,62.352 129.051,62.352 LED3.K
NetQ3_B: IC2.3 Q3.B | length 22.6
  Top Layer w1: Q3.B 120.15,78.425 120.509,78.066 120.509,77.889 121.975,76.423 v1(121.975,76.35)
  Bottom Layer w1: v1(121.975,76.35) 134.36,76.35 IC2.3
NetR4_1: R4.1 U2.44 | length 36.5
  Top Layer w0.254: v1(105.55,73.55) 106.862,72.238 106.862,71.086 106.85,71.074 U2.44
  Top Layer w1: R4.1 95.375,53.227 96.1,53.952 v1(96.1,54.025)
  Bottom Layer w1: v1(96.1,54.025) 96.1,57.05 95.225,57.925 95.225,67.811 98.964,71.55 103.55,71.55 v1(105.55,73.55)
NetR9_1: R9.1 U2.20 | length 27.6
  Top Layer w0.254: v1(101.86,54.925) 101.969,54.816 103.003,54.816 103.037,54.85 103.247,54.85 103.547,54.55 104.775,54.55 108.35,58.125 U2.20
  Top Layer w1: R9.1 88.292,49.651 89.901,49.651 93.925,53.675 93.925,54.3 95.05,55.425 98.577,55.425 99.002,55 v1(99.075,55)
  Bottom Layer w1: v1(99.075,55) 99.112,54.963 101.823,54.963 v1(101.86,54.925)
NetR26_1: IC2.4 R26.1 | length 9.8
  Top Layer w1: R26.1 128.55,79.875 128.55,79.975 129.247,80.672 129.247,81.364 129.35,81.467 v1(129.35,81.54)
  Bottom Layer w1: v1(129.35,81.54) 129.423,81.54 129.528,81.435 IC2.4
NetR27_1: IC2.1 R27.1 | length 15.6
  Top Layer w1: R27.1 122.4,72.825 123.573,73.998 123.573,74.248 v1(123.625,74.3)
  Bottom Layer w1: v1(123.625,74.3) 123.698,74.3 124.183,73.815 IC2.1
NRST: C14.2 R8.1 SW1.2 U2.7 | length 73.2
  Top Layer w0.254: 98.375,62.775 99.692,62.775 101.742,64.825 U2.7
  Top Layer w1: R8.1 71.75,55.625 71.811,55.564 72.639,55.564 72.698,55.623 73.098,55.623 v1(73.15,55.675) ; C14.2 76.978,58.745 79.032,58.745 v1(79.083,58.693) ; v1(81.195,56.92) 81.268,56.92 81.563,56.625 92.125,56.625 95.275,59.775 98.337,59.775 ; 98.375,62.775 97.465,61.865 97.465,60.647 98.512,59.6 100.423,59.6 101.47,58.553 101.47,57.447 101.175,57.152 101.175,56.45 100.525,55.8 100.525,52.805 99.25,51.53 SW1.2
  Bottom Layer w1: v1(73.15,55.675) 76.825,55.675 77.618,56.468 77.618,57.155 79.083,58.62 v1(79.083,58.693) 79.135,58.642 79.473,58.642 v1(81.195,56.92)
PA0: U2.10
PA1: DIM.3 U2.11 | length 94.5
  Top Layer w0.254: v1(102.25,60.045) 102.185,60.11 102.185,62.61 102.377,62.802 103.339,62.802 U2.11
  Top Layer w1: DIM.3 48.34,59.71 48.34,54.522 50.3,52.562 50.3,46.528 51.623,45.205 51.623,43.427 v1(51.675,43.375) ; v1(64.758,44) 66.446,45.688 68.188,45.688 v1(69.875,47.375)
  Bottom Layer w1: v1(51.675,43.375) 64.06,43.375 64.685,44 v1(64.758,44) ; v1(69.875,47.375) 70.05,47.55 99.85,47.55 108.086,55.786 108.086,57.914 105.94,60.06 102.265,60.06 v1(102.25,60.045)
PA2: U2.12
PA3: U2.13
PA4: ADC.3 U2.14 | length 65.4
  Top Layer w0.254: v1(102.875,57.825) 102.875,58.025 103.769,58.919 104.395,58.919 105.327,59.852 105.327,60.814 U2.14
  Top Layer w1: v1(65.85,53.475) 81.45,53.475 82.375,54.4 91.775,54.4 94.075,56.7 95.575,56.7 95.975,57.1 99.235,57.1 v1(100.135,58)
  Bottom Layer w1: ADC.3 54,53.95 59.651,53.95 60.126,53.475 v1(65.85,53.475) ; v1(100.135,58) 102.627,58 102.802,57.825 v1(102.875,57.825)
PA5: ADC.2 U2.15 | length 69.3
  Top Layer w0.254: v1(103.275,55.95) 103.275,55.974 103.981,56.681 103.981,57.417 104.493,57.929 105.429,57.929 105.85,58.35 U2.15
  Top Layer w1: v1(57.925,51.015) 70.292,51.015 70.452,51.175 v1(70.525,51.175)
  Bottom Layer w1: ADC.2 53.565,51.015 v1(57.925,51.015) ; v1(70.525,51.175) 85.712,51.175 85.887,51 101,51 103.315,53.315 103.315,55.91 v1(103.275,55.95)
PA6: U2.16
PA7: U2.17
PA8: U2.29
PA9: HMI.2 U2.30 | length 40.4
  Top Layer w0.254: U2.30 113.276,64.825 113.663,64.438 113.663,64.204 116.267,61.6 v1(117.7,61.6)
  Bottom Layer w1: v1(117.7,61.6) 132.388,61.6 139.538,68.75 HMI.2
PA10: HMI.3 U2.31 | length 38.5
  Top Layer w0.254: U2.31 113.418,65.325 115.342,63.401 116.198,63.401 117.1,64.303 117.1,65.325 117.3,65.525
  Top Layer w1: 117.3,65.525 118.025,66.25 HMI.3
PA15: U2.38
PB0: U2.18
PB1: U2.19
PB3: U2.39
PB4: U2.40
PB5: U2.41
PB6: I2C_1.2 R100.2 U2.42 | length 87.3
  Top Layer w0.254: U2.42 107.85,71.085 108.272,71.507 108.272,78.228 v1(108.175,78.325)
  Top Layer w1: R100.2 59.125,47.22 60.475,45.87 I2C_1.2
  Bottom Layer w1: I2C_1.2 60.477,39.975 61.931,38.521 64.019,38.521 67.293,41.795 67.293,50.368 70.134,53.209 79.372,53.209 89.207,63.044 89.207,63.49 99.042,73.325 102.3,73.325 107.248,78.273 108.123,78.273 v1(108.175,78.325)
PB7: I2C_1.1 R101.2 U2.43 | length 80.1
  Top Layer w0.254: v1(103.6,76.825) 105.204,75.221 105.24,75.221 107.818,72.642 107.818,71.695 107.35,71.227 U2.43
  Top Layer w1: I2C_1.1 62.975,46.125 64.07,47.22 R101.2
  Bottom Layer w1: I2C_1.1 66.093,43.093 66.093,51.544 77.039,62.49 85.49,62.49 99.825,76.825 v1(103.6,76.825)
PB8: U2.45
PB9: R27.2 U2.46 | length 17.5
  Top Layer w0.254: U2.46 105.873,69.336 105.873,71.698 v1(105.9,71.725)
  Top Layer w1: v1(115.815,72.75) 115.827,72.738 120.488,72.738 R27.2
  Bottom Layer w1: v1(105.9,71.725) 114.717,71.725 115.742,72.75 v1(115.815,72.75)
PB10: I2C_2.2 R103.2 U2.21 | length 56.4
  Top Layer w0.254: U2.21 108.827,60.814 108.827,54.923 v1(108.969,54.781)
  Top Layer w1: R103.2 73.59,47.22 76.075,44.735 I2C_2.2
  Bottom Layer w1: I2C_2.2 76.075,44.6 76.775,45.3 99.7,45.3 108.917,54.517 108.917,54.729 v1(108.969,54.781)
PB11: I2C_2.1 R102.2 U2.22 | length 53.8
  Top Layer w0.254: U2.22 109.35,58.5 v1(111.075,56.775)
  Top Layer w1: I2C_2.1 78.575,45.272 80.523,47.22 R102.2
  Bottom Layer w1: I2C_2.1 87.246,39.975 90.021,42.75 99.4,42.75 111.023,54.373 111.023,56.723 v1(111.075,56.775)
PB12: R7.1 U2.25 | length 15.2
  Top Layer w0.254: U2.25 113.069,62.325 115.15,60.244
  Top Layer w1: 115.15,60.244 115.15,55.85 116.5,54.5 R7.1
PB13: U2.26
PB14: U2.27
PB15: DIM.4 U2.28 | length 143.2
  Top Layer w0.254: U2.28 113.4,63.825 117.425,59.8 v1(117.425,59.65)
  Top Layer w1: DIM.4 46.604,63.946 48.829,63.946 50.325,62.45 50.325,58.098 50.089,57.862 50.089,57.034 51,56.123 v1(51,56.05)
  Bottom Layer w1: v1(51,56.05) 48.4,53.45 45.975,53.45 43.175,50.65 43.175,35.061 46.211,32.025 110.25,32.025 117.425,39.2 v1(117.425,59.65)
PC13: R13.1 U2.2 | length 25.7
  Top Layer w0.254: v1(101.106,67.219) 101.19,67.302 103.339,67.302 U2.2
  Top Layer w1: v1(118.8,63.6) 118.873,63.6 119.273,63.2 119.5,63.2 120.386,62.314 R13.1
  Bottom Layer w1: v1(101.106,67.219) 103.667,64.658 111.692,64.658 114.2,62.15 115.475,62.15 116.873,63.548 118.748,63.548 v1(118.8,63.6)
SWCLK: J2.2 U2.37 | length 34.4
  Top Layer w0.254: U2.37 110.35,77.35 v1(111.2,78.2)
  Bottom Layer w1: v1(111.2,78.2) 111.2,80.2 114.5,83.5 114.5,85.575 115.95,87.025 115.95,94.615 120.245,98.91 120.245,99.56 J2.2
SWDIO: J2.3 U2.34 | length 40.9
  Top Layer w0.254: U2.34 116.15,66.825 v1(118.325,69)
  Bottom Layer w1: v1(118.325,69) 117.15,70.175 117.15,86.1 118.75,87.7 118.75,94.875 122.85,98.975 J2.3
XTALA: C12.2 R5.1 U2.5 Y1.1 | length 28.2
  Top Layer w0.254: 99.9,65.875 99.95,65.825 U2.5
  Top Layer w1: R5.1 77.008,67.983 82.792,67.983 C12.2 91.1,67.99 91.2,68.09 Y1.1 97.05,68.725 99.9,65.875
XTALB: C13.2 R5.2 U2.6 Y1.2 | length 43.2
  Top Layer w0.254: 99.85,64.548 100.223,64.175 100.45,64.175 101.6,65.325 U2.6
  Top Layer w1: R5.2 76.9,66.075 76.75,65.925 76.75,65.825 74.45,63.525 74.45,57.2 75.15,56.5 78.778,56.5 80.968,58.69 82.665,58.69 C13.2 86,58.825 87.9,60.725 Y1.2 93.85,60.725 97.673,64.548 99.85,64.548
XTALC: U2.3
XTALD: U2.4
pads on no net: J2. J4.4 R?.1 R?.2 U1.4

## Polygon pours and split planes (outlines as drawn)
GND on Top Layer "GND_L01_P000" (solid, pour order 0): 37.35,77.575 37.35,32.94 ccw(c39.89,32.94) 39.89,30.4 154.76,30.4 ccw(c154.76,32.94) 157.3,32.94 157.3,101.86 ccw(c154.76,101.86) 154.76,104.4 39.865,104.4 ccw(c39.865,101.86) 37.325,101.86 37.325,97.8
GND on Bottom Layer "GND_L02_P001" (solid, pour order 1): 37.25,33.065 ccw(c39.79,33.065) 39.79,30.525 154.735,30.525 ccw(c154.735,33.065) 157.275,33.065 157.275,101.51 ccw(c154.735,101.51) 154.735,104.05 39.79,104.05 ccw(c39.79,101.51) 37.25,101.51 37.25,85.55

## Keep-outs
Keep-Out Layer:
  lines w0.2: 37.325,100.375 37.325,34.4 ccw(c41.325,34.4) 41.325,30.4 ; 37.35,100.4 cw(c41.35,100.4) 41.35,104.4 153.325,104.4 cw(c153.325,100.4) 157.325,100.4 157.325,34.375 cw(c153.325,34.375) 153.325,30.375 41.35,30.375

## Silkscreen, mask and mechanical layers (free items; w line width, h text height)
Top Overlay:
  drawing of 42 lines, arcs and shapes, not listed
  text "INCUBATOR MAIN" at 152.9,59.625 h1.5 r270
  text "BOARD V0.1" at 148.4,55.3 h1.5 r270

## Text inside footprints (layer, text, board x,y; h text height)
B1: Top Overlay "+" at 153.97,88.425 h1.27 r270; Top Overlay "-" at 144.71,88.425 h1.27 r270; Mechanical 13 "+" at 153.97,88.425 h1.27 r270; Mechanical 13 "-" at 144.71,88.425 h1.27 r270
LED1: Top Overlay "A" at 131.965,46.376 h0.51; Top Overlay "K" at 127.253,46.301 h0.56
LED2: Top Overlay "A" at 131.965,54.296 h0.51; Top Overlay "K" at 127.253,54.221 h0.56
LED3: Top Overlay "A" at 131.965,62.215 h0.51; Top Overlay "K" at 127.253,62.14 h0.56